# Altium PCB Prototype.PcbDoc
Units mm, origin at the board's own origin, x right, y up, seen from the top; angles counter-clockwise.
Board outline 33 x 25 mm, 2 copper layers (Top Layer, Bottom Layer); 28 components, 41 nets, 89 pads, 4 vias.
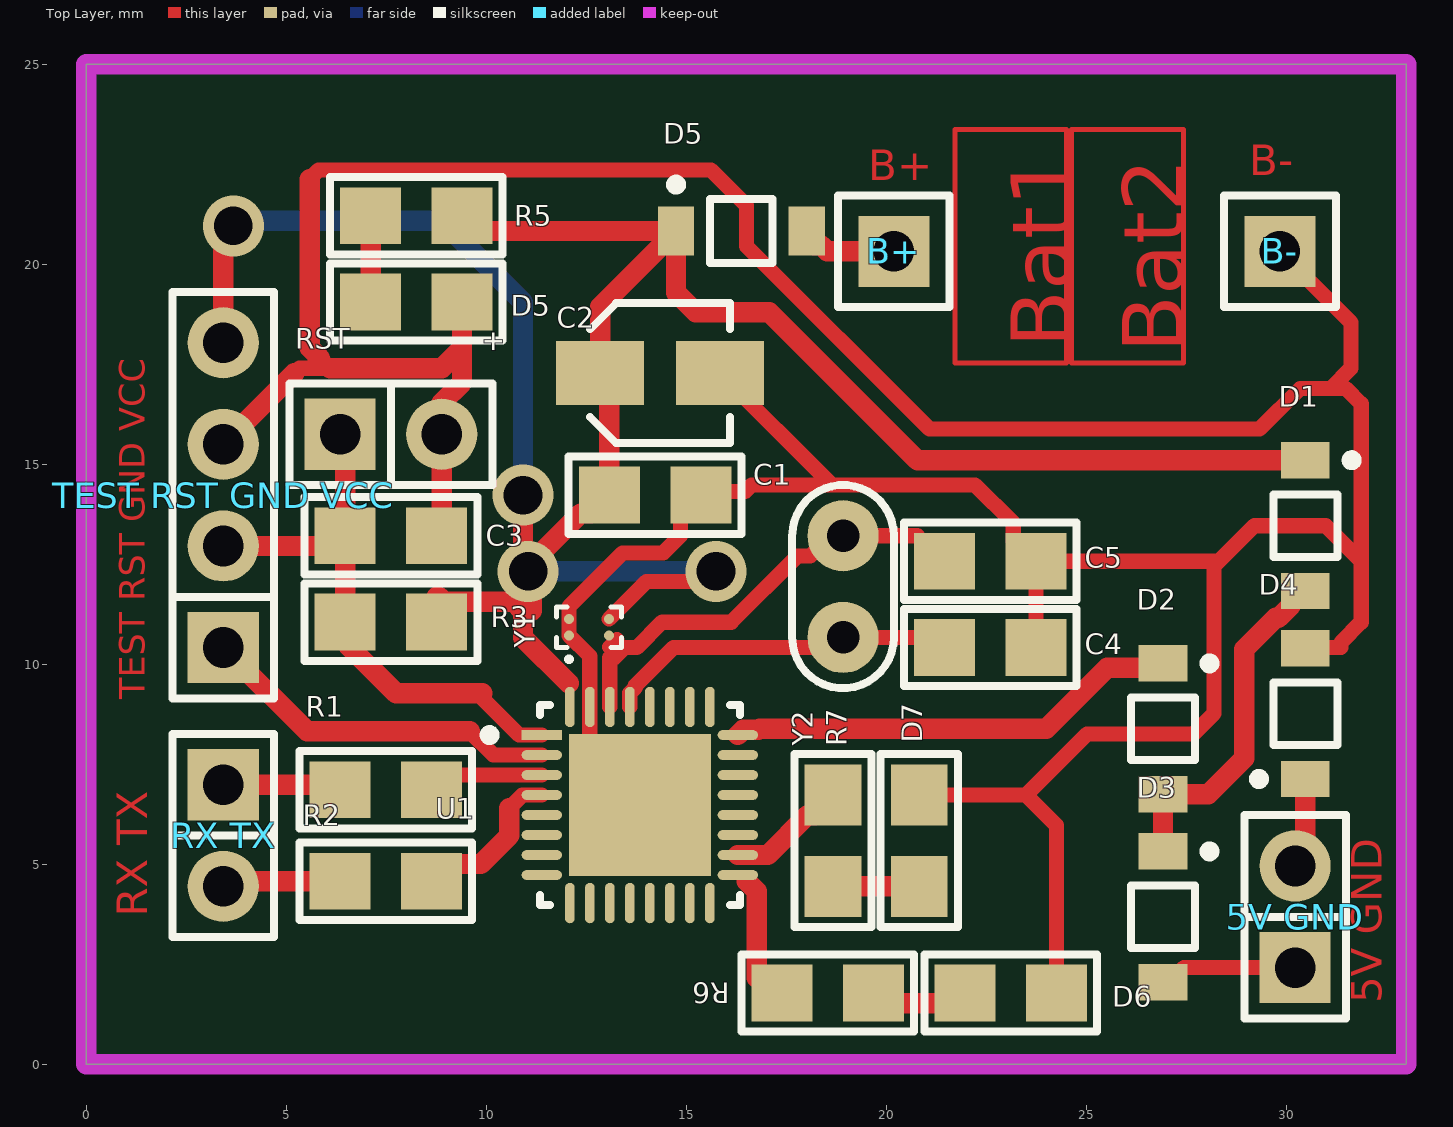
[diagram p0: Top Layer view]
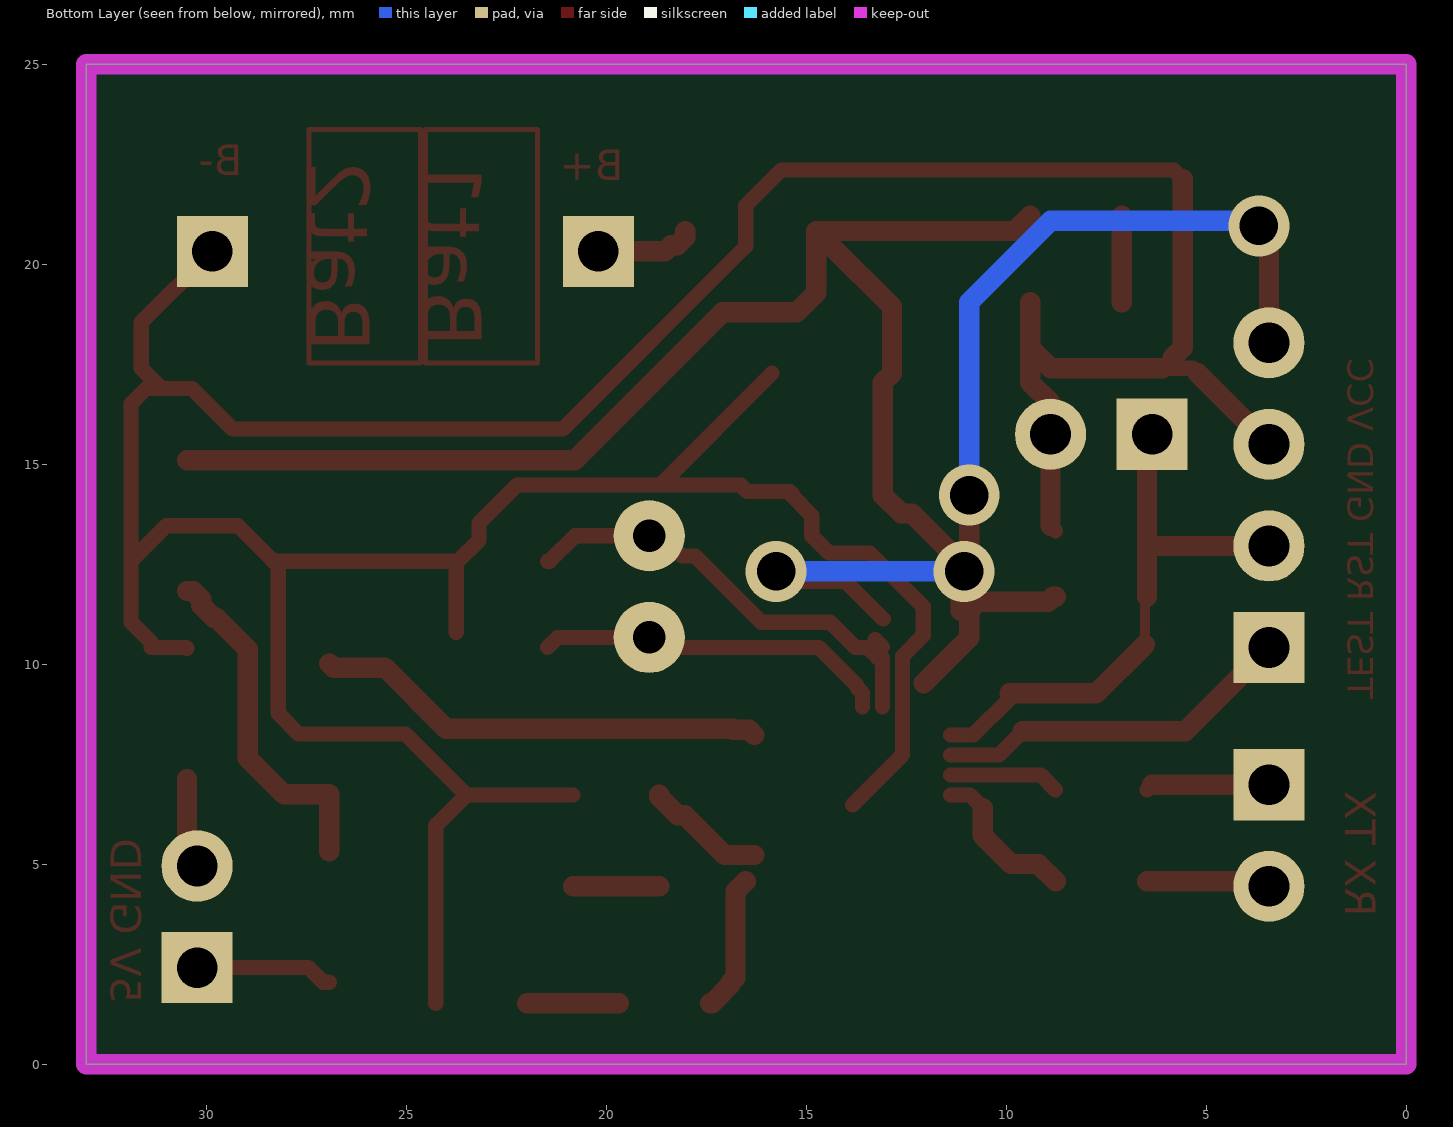
[diagram p1: Bottom Layer view, seen from below]
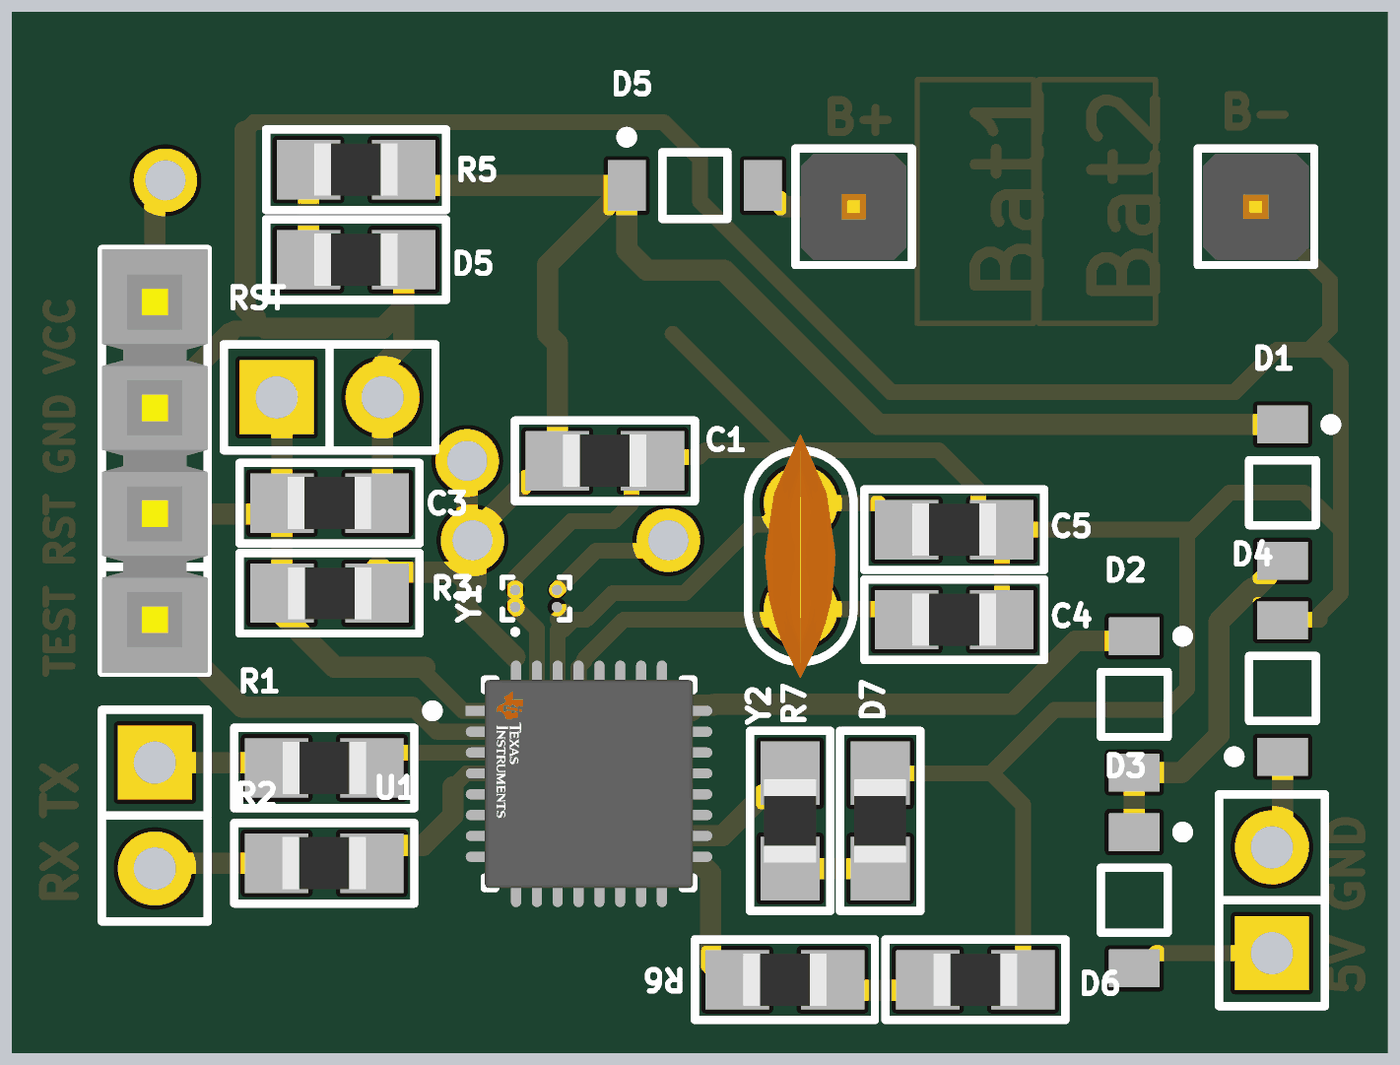
[diagram p2: 3D render of the assembled board from above, using the file's embedded part models]

## Layer stack, top to bottom
Top Solder: solder mask 0.0102, Solder Resist, Dk 3.5
Top Layer: signal copper 0.0356
Dielectric 1: dielectric 0.32, FR-4, Dk 4.8
Bottom Layer: signal copper 0.0356
Bottom Solder: solder mask 0.0102, Solder Resist, Dk 3.5

## Board outline
0,0 0,25 33,25 33,0

## Design rules (kind name [scope] priority, off if disabled: settings)
Clearance [All] p1: gap=0.051 ignorepadtopadclearanceinfootprint=TRUE
PolygonConnect [All] p1: connectstyle=Relief reliefconductorwidth=0.254 reliefentries=4 polygonreliefangle="90 Angle" airgapwidth=0.254
RoutingVias [All] p1: holewidth=0.711 width=1.27 viastyle="Through Hole" minholewidth=0.711 minwidth=1.27 maxholewidth=0.711 maxwidth=1.27
SolderMaskExpansion [All] p1: expansion=0.102 istentingtop=FALSE
Width [All] p1: maxlimit=1.016 minlimit=0.254 preferedwidth=0.508
30 further rules are at their usual default settings.

## Classes and differential pairs
component class Prototype: b+ C1 C2 C3 C4 C5 D1 D2 D3 D4 D5 D7 R1 R2 R3 R5 R6 R7 RST U1 Y1 Y2

## Components (designator, comment, footprint, x,y, rotation, side; value= is the part's Value field where it differs from the comment)
"5V GND" "CON2" SIP2 30.226,3.683 r90 top (schematic designator PWR)
B+ "TP" TPTH 20.193,20.32 r180 top (schematic designator BAT+)
B- "TP" TPTH 29.845,20.32 r90 top (schematic designator BAT-)
C1 "100nF" 0805 14.224,14.224 r0 top
C2 "10uF" WCAP-ASLU_D3H5.5 -1255.649,-1252.728 r180 top locked
C3 "1nF" 0805 7.62,13.208 r0 top
C4 "12pF" 0805 22.606,10.414 r0 top
C5 "12pF" 0805 22.606,12.573 r0 top
D1 "MMSD4148T1G" ONSC-SOD-123-2-425-04_V 30.48,13.462 r270 top
D2 "MMSD4148T1G" ONSC-SOD-123-2-425-04_V 26.924,8.382 r270 top
D3 "MMSD4148T1G" ONSC-SOD-123-2-425-04_V 26.924,3.683 r270 top
D4 "MMSD4148T1G" ONSC-SOD-123-2-425-04_V 30.48,8.763 r90 top
D5 "MMSD4148T1G" ONSC-SOD-123-2-425-04_V 16.383,20.828 r0 top
D5 "LED" 0805 8.255,19.05 r0 top
D6 "LED" 0805 23.114,1.778 r0 top
D7 "LED" 0805 20.828,5.588 r90 top
R1 "100" 0805 7.493,6.858 r180 top
R2 "100" 0805 7.493,4.572 r0 top
R3 "47k" 0805 7.62,11.049 r180 top
R5 "2k2" 0805 8.255,21.209 r0 top
R6 "2k2" 0805 18.542,1.778 r180 top
R7 "2k2" 0805 18.669,5.588 r90 top
RST "CON2" SIP2 7.62,15.748 r0 top
"RX TX" "CON2" SIP2 3.429,5.715 r270 top (schematic designator COM)
"TEST RST GND VCC" "CON4" SIP4 3.429,14.224 r90 top (schematic designator PROG)
U1 "MSP430FR2476TRHBR" FP-RHB0032E-IPC_A 13.843,6.477 r0 top
Y1 "XTAL" BGA4C100X41P2X2_154X84X60N 12.573,10.922 r90 top
Y2 "CRISTAL" CAP100 18.923,11.938 r90 top

## Footprints (in the part's own frame and the unit in brackets; to place one, negate y for a bottom-side part, rotate by r counter-clockwise, add the part's x,y. Pads: shape width x height; smd on the part's side, far side on the other; paste and mask are expansions set on the pad)
0805 [mil] "Pasivo 0805"
  rect 60x56 smd: 1(-45,0) 2(45,0)
  silkscreen extent -85,-38 85,38, body extent -40,-24 39,25, height 15
BGA4C100X41P2X2_154X84X60N [mm]
  round 0.25 smd: 1(-0.205,0.5) 2(-0.205,-0.5) 3(0.205,-0.5) 4(0.205,0.5)
  silkscreen extent -0.82,-0.81 0.51,0.81
CAP100 [mil]
  round 70 hole 32: 1(-50,0) 2(50,0)
  silkscreen extent -100,-50 100,50, body extent -115,-33 115,34, height 241
FP-RHB0032E-IPC_A [mm]
  rect 1.01x0.242 smd paste+0 mask+0: 1(-2.451,1.75)
  rrect100% 1.01x0.242 smd paste+0 mask+0: 2(-2.451,1.25) 3(-2.451,0.75) 4(-2.451,0.25) 5(-2.451,-0.25) 6(-2.451,-0.75) 7(-2.451,-1.25) 8(-2.451,-1.75) 17(2.451,-1.75) 18(2.451,-1.25) 19(2.451,-0.75) 20(2.451,-0.25) 21(2.451,0.25) 22(2.451,0.75) 23(2.451,1.25) 24(2.451,1.75)
  rrect100% 0.242x1.01 smd paste+0 mask+0: 9(-1.75,-2.451) 10(-1.25,-2.451) 11(-0.75,-2.451) 12(-0.25,-2.451) 13(0.25,-2.451) 14(0.75,-2.451) 15(1.25,-2.451) 16(1.75,-2.451) 25(1.75,2.451) 26(1.25,2.451) 27(0.75,2.451) 28(0.25,2.451) 29(-0.25,2.451) 30(-0.75,2.451) 31(-1.25,2.451) 32(-1.75,2.451)
  rect 3.55x3.55 smd paste-1000 mask+0: 33(0,0)
  silkscreen extent -3.88,-2.5 2.5,2.5, body extent -3.46,-3.46 3.46,3.46, height 0.25
ONSC-SOD-123-2-425-04_V [mm] "SOD, 2-Leads, Body 2.69x1.6mm"
  rect 0.91x1.22 smd: 1(-1.635,0) 2(1.635,0)
  silkscreen extent -1.76,-0.8 0.78,1.29, body extent -1.35,-0.8 1.35,0.8, height 1.35
SIP2 [mil]
  rect 70x70 hole 40: 1(-50,0)
  round 70 hole 40: 2(50,0)
  silkscreen extent -100,-50 100,50
SIP4 [mil]
  rect 70x70 hole 40: 1(-150,0)
  round 70 hole 40: 2(-50,0) 3(50,0) 4(150,0)
  silkscreen extent -200,-50 200,50, body extent -200,-50 200,50, height 330
TPTH [mil]
  rect 70x70 hole 40: 1(0,0)
  silkscreen extent -55,-55 55,55, body extent -50,-50 50,50, height 238
WCAP-ASLU_D3H5.5 [mm] "Aluminum Electrolytic Capacitors, body diameter 3mm"
  rect 2.2x1.6 smd: 1(-1268.5,-1270) 2(-1271.5,-1270)
  silkscreen extent -1271.75,-1271.75 -1268.25,-1268.25, body extent -1271.9,-1271.65 -1268.1,-1268.35, height 5.5

## Part data
C1 C3 C4 C5: library part CAP
C2: library part CMP-207834-000002-2, "CAP ALUM 10UF 20% 16V SMD", Capacitance=10µF, Case/Package=Radial, Leakage Current=3µA, Max Operating Temperature=85°C, Min Operating Temperature=-40°C, Ripple Current=20mA, Tolerance=20%, Voltage Rating=16V, Diameter=3mm, Dissipation Factor=18%, Height=5.5mm, Length=5.5mm, Life (Hours)=2000hours, NexarPartId=97583746, RoHS=Compliant, Voltage Rating (DC)=16V, Width=3.3mm
D1 D2 D3 D4 D5: library part CMP-0895-00001-2, "Switching Diode, 2-Pin SOD-123, Pb-Free, Tape and Reel", Manufacturer="On Semiconductor", ComponentLink1Description="Manufacturer URL", ComponentLink1URL=http://www.onsemi.com/, ComponentLink2Description=Datasheet, ComponentLink2URL=http://www.onsemi.com/pub_link/Collateral/MMSD4148T1-D.PDF, ComponentLink3Description="Package Specification", ComponentLink3URL=http://www.onsemi.com/pub_link/Collateral/425-04.PDF, Configuration=Single, DatasheetVersion="Rev. 11", IF Max (A)=0.2, Mounting Technology="Surface Mount", PackageDescription="2-Pin SOD, Body 1.6 x 2.69 mm", PackageReference=SOD-123-2-425-04, PackageVersion="Rev. G, 10/2009", Packing="Tape and Reel", PartNumber=MMSD4148T1G, RoHS=TRUE, trr Max (ns)=4
R1 R2 R3 R5 R6 R7: library part RES
U1: library part CMP-04869-000099-1, "IC MCU 16BIT 64.5KB FRAM 32VQFN"

## Via types
v1: diameter 1.524, hole 0.965, Top Layer to Bottom Layer, 4 vias

## Nets (pads, with @x,y where several pads share a name; then routed paths per layer and width w, separated by ;. In a path a pad name is that pad's centre, name@x,y a point inside that pad or via, vN(x,y) a via of type N, cw(c..) or ccw(c..) an arc to the next point about the centre after c; other vN are vias at no path point)
Base_Detect: D2.1 U1.24 | length 11.4
  Top Layer w0.508: U1.24 16.427,8.36 16.811,8.36 16.833,8.382 24.003,8.382 25.527,9.906 26.813,9.906 D2.1
DVCC: "TEST RST GND VCC.4" C1.1 C2.1 D1.1 D5.1@14.748,20.828 R3.1 R5.2 U1.32 Y1.3 | length 66.2
  Top Layer w0.381: Y1.3 14.011,12.065 15.08,12.065 15.164,12.149 15.578,12.149 v1(15.748,12.319)
  Top Layer w0.508: 3.429,18.034 3.429,20.828 v1@3.556,20.955 ; R3.1@8.763,11.684 8.823,11.684 8.951,11.556 10.694,11.556 10.922,11.327 10.922,10.663 12.065,9.52 ; R5.2 9.779,20.828 14.748,20.828 D5.1@14.748,20.673 ; v1(10.922,14.224) 10.922,12.446 v1(11.049,12.319) ; 11.138,11.327 11.138,12.23 v1(11.049,12.319) ; D1.1 20.782,15.097 17.083,18.796 15.24,18.796 14.748,19.288 14.748,20.472 D5.1@14.748,20.673 ; v1(11.049,12.319) 11.049,12.453 12.363,13.767 12.624,13.767 C1.1 13.081,17.042 C2.1 12.851,18.931 14.392,20.472 14.547,20.472 D5.1@14.748,20.673
  Bottom Layer w0.508: v1(3.683,20.955) 3.81,21.082 8.89,21.082 10.922,19.05 v1(10.922,14.224) ; v1(11.049,12.319) v1(15.748,12.319)
DVSS: "TEST RST GND VCC.3" B-.1 C1.2 C2.2 C3.2 C4.2 C5.2 D4.2 D5.2@9.398,19.05 D6.2 D7.2 RST.2 U1.31 U1.33 Y1.1 Y1.4 | length 111.4
  Top Layer w0.381: 5.207,17.272 5.334,17.399 5.842,17.399 6.096,17.399 5.969,17.526 5.842,17.653 ; 5.588,22.129 5.811,22.352 15.621,22.352 16.51,21.463 16.51,20.447 21.082,15.875 29.337,15.875 30.353,16.891 31.115,16.891 ; C3.2@8.763,13.335 C3.2@8.89,13.462 ; RST.2@8.89,16.256 RST.2@8.89,16.531 ; U1.33 12.593,7.727 U1.31 12.593,10.197 Y1.1 Y1.4 12.073,11.438 13.41,12.775 14.426,12.775 14.861,13.21 14.861,13.718 C1.2 ; C1.2@15.342,14.249 15.411,14.318 16.477,14.318 16.637,14.478 18.645,14.478 ; C2.2 18.645,14.478 ; D7.2 23.495,6.731 ; C4.2@23.749,10.795 C5.2 ; D6.2@24.257,1.524 24.257,5.969 23.495,6.731 ; B-.1 31.623,18.542 31.623,17.399 31.115,16.891 ; D4.2 30.496,10.414 31.369,10.414 31.369,10.541 31.877,11.049 31.877,12.573 ; 18.645,14.478 22.225,14.478 23.18,13.523 23.18,13.094 23.7,12.573 C5.2 ; 23.495,6.731 25.019,8.255 27.686,8.255 28.194,8.763 28.194,12.446 28.321,12.573 ; C5.2 28.321,12.573 ; 28.321,12.573 29.21,13.462 30.988,13.462 31.877,12.573 ; 31.115,16.891 31.496,16.891 31.877,16.51 31.877,12.573
  Top Layer w0.508: 3.429,15.494 5.207,17.272 ; 5.588,22.129 5.588,17.907 5.842,17.653 ; 6.096,17.399 8.89,17.399 9.398,17.907 ; C3.2@8.89,13.462 RST.2 ; RST.2@8.89,16.531 9.398,17.039 9.398,17.907 ; D5.2@9.398,19.05 9.398,17.907
GNDext: "5V GND.2" D4.1 | length 2.2
  Top Layer w0.508: 30.48,4.953 D4.1
NC: U1.20
NetBAT+_1: B+.1 D5.2@18.018,20.828 | length 2.5
  Top Layer w0.508: D5.2@18.018,20.828 18.018,20.673 18.219,20.472 18.374,20.472 18.526,20.32 B+.1
NetD1_2: D1.2 D2.2 D3.1 | length 8.8
  Top Layer w0.508: D3.1 D2.2 28.055,6.747 28.956,7.648 28.956,10.37 29.744,11.158 29.811,11.158 30.124,11.471 30.124,11.626 30.325,11.827 D1.2
NetD5_1: D5.1@7.112,19.05 R5.1 | length 2.2
  Top Layer w0.508: D5.1@7.112,19.05 R5.1
NetD6_1: D6.1 R6.1 | length 2.3
  Top Layer w0.508: R6.1@19.685,1.524 D6.1@21.971,1.524
NetD7_1: D7.1 R7.1 | length 2.2
  Top Layer w0.508: R7.1 D7.1
P1.0: U1.7
P1.1: U1.8
P1.2: U1.9
P1.3: U1.10
P1.4: R1.1 U1.3 | length 2.8
  Top Layer w0.381: R1.1@8.763,6.858 9.132,7.227 U1.3
P1.5: R2.2 U1.4 | length 3.9
  Top Layer w0.381: 10.582,6.403 10.906,6.727 U1.4
  Top Layer w0.508: R2.2@8.763,4.572 9.192,5.001 9.868,5.001 10.582,5.715 10.582,6.403
P1.6: U1.5
P1.7: U1.6
P2.0: C4.1 U1.29 Y2.1 | length 8.9
  Top Layer w0.381: U1.29 13.593,9.275 13.73,9.412 13.73,9.462 14.682,10.414 18.103,10.414 18.128,10.44 18.695,10.44 Y2.1 21.209,10.668 C4.1
P2.1: C5.1 U1.30 Y1.2 Y2.2 | length 11.4
  Top Layer w0.381: U1.30 13.093,10.16 13.208,10.16 13.463,10.415 13.767,10.415 14.402,11.049 16.129,11.049 17.78,12.7 18.103,12.7 18.611,13.208 Y2.2 20.777,13.208 21.412,12.573 C5.1 ; 13.093,10.429 13.271,10.606
P2.2: U1.11
P2.3: U1.14
P2.4: R6.2 U1.17 | length 3.4
  Top Layer w0.508: 16.51,4.572 16.764,4.318 16.764,2.159 16.891,2.032 16.891,1.981 17.348,1.524 R6.2@17.399,1.524
P2.5: R7.2 U1.18 | length 3
  Top Layer w0.508: U1.18 17.038,5.227 18.034,6.223 18.212,6.223 18.669,6.68 R7.2
P2.6: U1.19
P2.7: U1.25
P3.0: U1.12
P3.1: U1.16
P3.2: U1.27
P3.3: U1.13
P3.4: U1.15
P3.5: U1.26
P3.6: U1.28
P3.7: U1.21
P4.0: U1.22
P4.1: U1.23
RSTn: "TEST RST GND VCC.2" C3.1 R3.2 RST.1 U1.1 | length 14.9
  Top Layer w0.254: C3.1@6.223,12.954 C3.1 ; RST.1@6.35,16.256 RST.1@6.477,16.129 ; R3.2@6.477,11.684 6.528,11.684 R3.2@6.528,10.49
  Top Layer w0.381: 9.906,9.271 9.906,9.144 10.823,8.227 U1.1
  Top Layer w0.508: 3.429,12.954 C3.1@6.223,12.954 ; R3.2@6.477,11.684 C3.1 RST.1@6.477,16.129 ; R3.2@6.528,10.49 7.747,9.271 9.906,9.271
RX: "RX TX.2" R2.1 | length 2.8
  Top Layer w0.381: 3.683,4.445 3.81,4.572
  Top Layer w0.508: 3.81,4.572 R2.1@6.477,4.572
TEST: "TEST RST GND VCC.1" U1.2 | length 9.1
  Top Layer w0.381: 9.588,8.319 10.18,7.727 U1.2
  Top Layer w0.508: 3.429,10.414 5.524,8.319 9.588,8.319
TX: "RX TX.1" R1.2 | length 2.8
  Top Layer w0.381: R1.2@6.35,6.985 R1.2@6.477,6.858
  Top Layer w0.508: 3.683,6.985 R1.2@6.35,6.985
Vext: "5V GND.1" D3.2 | length 3.7
  Top Layer w0.381: D3.2 27.079,2.048 27.444,2.413 30.48,2.413
copper on no net: | length 34.5
  Top Layer w0.127: 21.717,17.526 21.717,23.368 24.511,23.368 24.511,17.526 21.717,17.526 ; 24.638,17.526 24.638,23.368 27.432,23.368 27.432,17.526 24.638,17.526

## Keep-outs
Keep-Out Layer:
  the board outline again, w0.508

## Other copper
Top Layer:
  text "Bat1" at 24.638,17.907 h1.52 r90
  text "Bat2" at 27.432,17.78 h1.52 r90

## Text inside footprints (layer, text, board x,y; h text height)
C2: Top Overlay "+" at 10.401,17.772 h0.51 r90